# EAGLE board Orbiter_V3 (EAGLE 8.5.1)
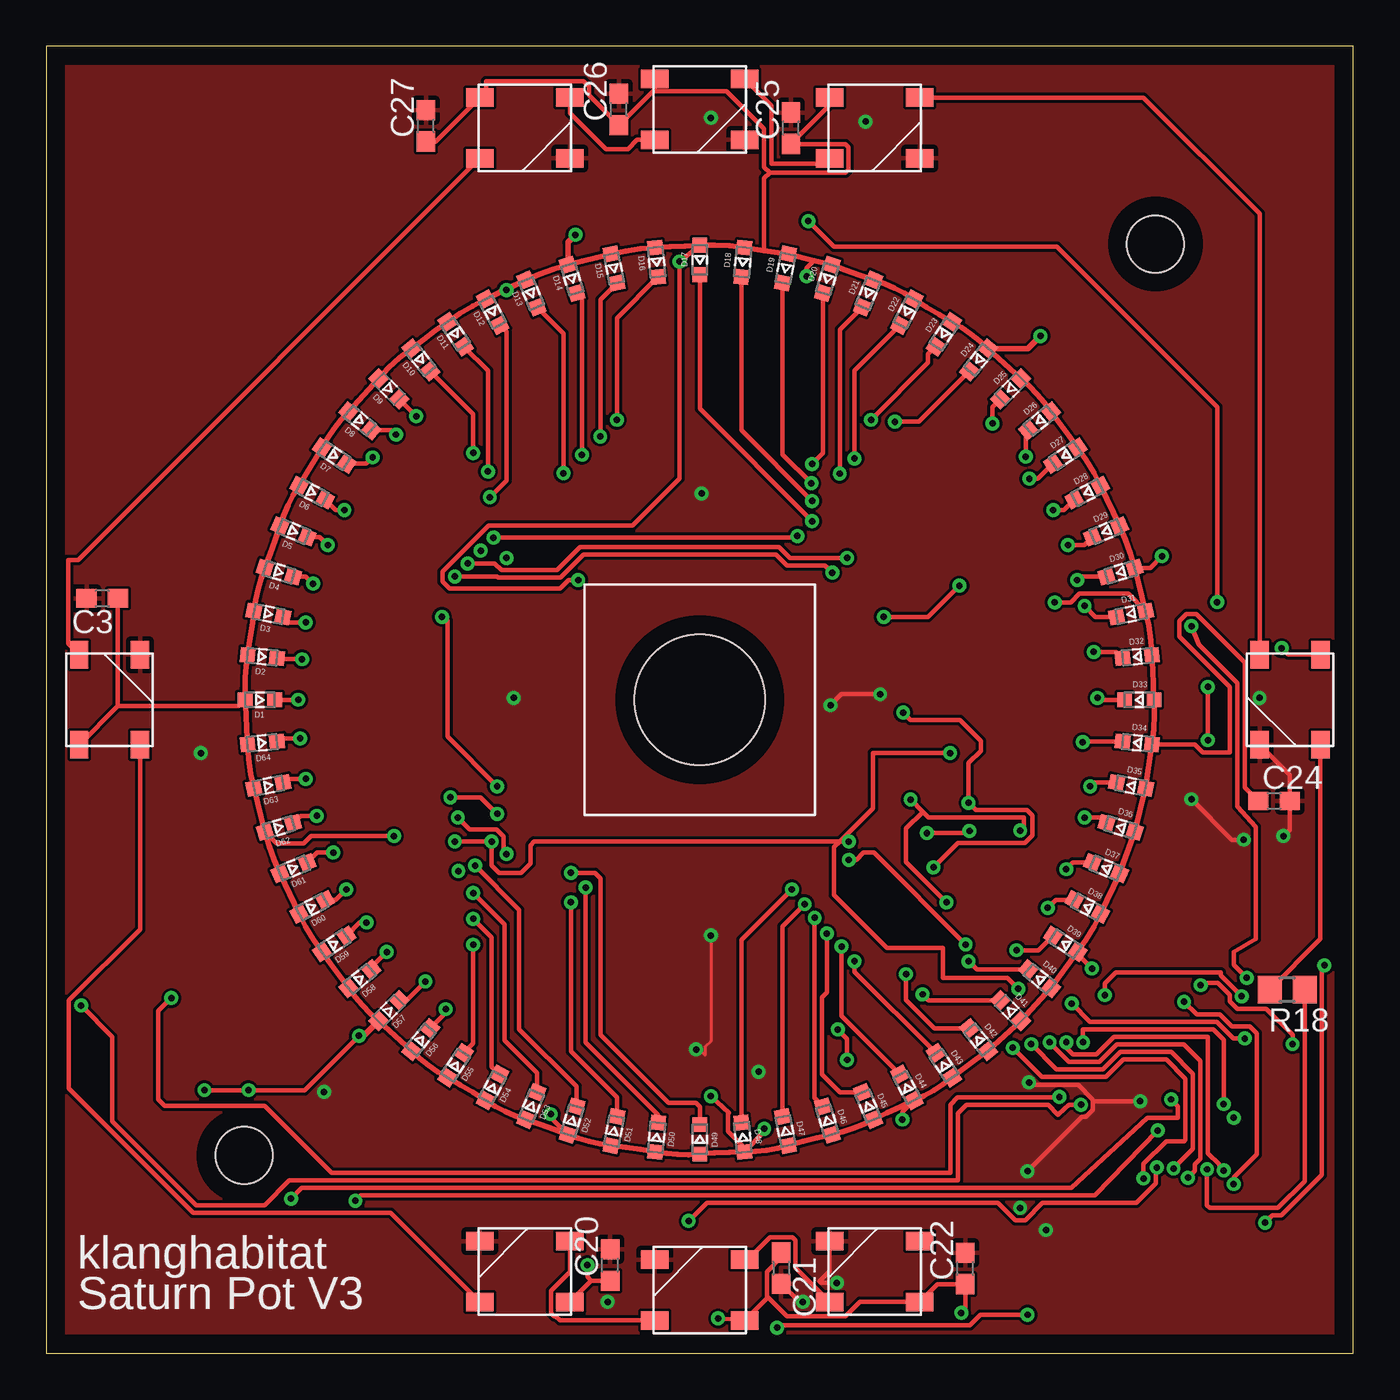
[diagram p0: board, top side]
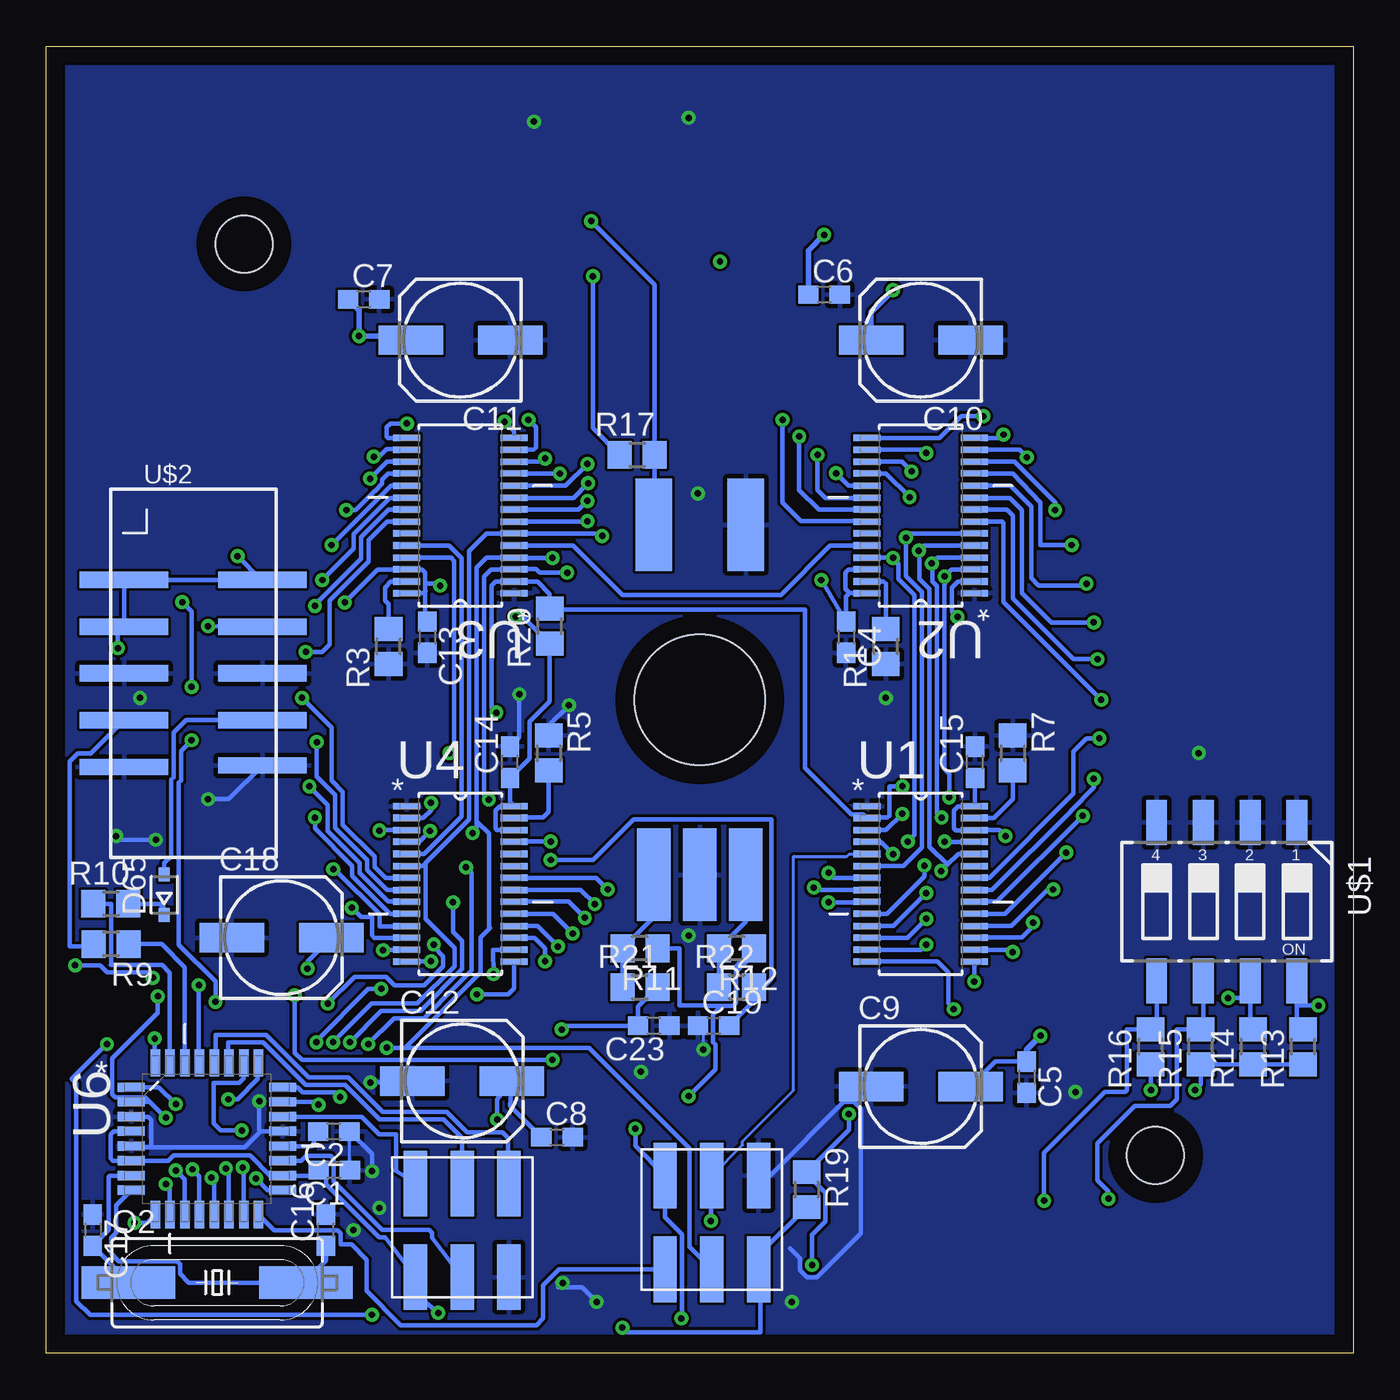
[diagram p1: board, bottom side, seen from below]

Size 71 x 71 mm. Coordinates in mm from the lower left corner, seen from the top.
Outline: 0,0 71,0 71,71 0,71 0,0
Copper layers (1*16): Top 0.035mm / dielectric 1.5mm / Bottom 0.035mm
Design rules "default": minimum track width 6mil, minimum drill 0.35mm, track to track 6mil, track to pad 6mil, pad to pad 6mil, via to via 6mil, smd to smd 6mil, copper to edge 40mil, drill to drill 6mil, minimum pad ring 10mil, minimum via ring 8mil, stop-mask expansion 4mil, vias tented up to drill 0mil, thermal gap 10mil
Holes 3.1 mm at 10.75,10.75 60.25,60.25

## Footprints (pad centres in the part's own frame; a part is rotated, then mirrored left to right if it is on the bottom)
C0603 = smd 1.1 x 1: 1 -0.85,0; 2 0.85,0
153CLV-0605 = smd 3.5 x 1.6: + 2.7,0; - -2.7,0
WL-SMCW_0603 = smd 0.8 x 0.8: 1 -0.8,0; 2 0.8,0
SOD323-R = smd 0.762 x 0.6: A 1.1,0; C -1.1,0
SM49 = smd 5.08 x 1.778: 1 -4.826,0; 2 4.826,0
R0805 = smd 1.3 x 1.5: 1 -0.95,0; 2 0.95,0
SOP65P640X120-29N = smd 1.473 x 0.356: 1 -2.921,4.216; 2 -2.921,3.581; 3 -2.921,2.921; 4 -2.921,2.286; 5 -2.921,1.626; 6 -2.921,0.965; 7 -2.921,0.33; 8 -2.921,-0.33; 9 -2.921,-0.965; 10 -2.921,-1.626; 11 -2.921,-2.286; 12 -2.921,-2.921; 13 -2.921,-3.581; 14 -2.921,-4.216; 15 2.921,-4.216; 16 2.921,-3.581; 17 2.921,-2.921; 18 2.921,-2.286; 19 2.921,-1.626; 20 2.921,-0.965; 21 2.921,-0.33; 22 2.921,0.33; 23 2.921,0.965; 24 2.921,1.626; 25 2.921,2.286; 26 2.921,2.921; 27 2.921,3.581; 28 2.921,4.216
QFP80P900X900X120-32N = smd 1.473 x 0.508: 1 -4.115,2.794; 2 -4.115,2.007; 3 -4.115,1.194; 4 -4.115,0.406; 5 -4.115,-0.406; 6 -4.115,-1.194; 7 -4.115,-2.007; 8 -4.115,-2.794; 17 4.115,-2.794; 18 4.115,-2.007; 19 4.115,-1.194; 20 4.115,-0.406; 21 4.115,0.406; 22 4.115,1.194; 23 4.115,2.007; 24 4.115,2.794 | smd 0.508 x 1.473: 9 -2.794,-4.115; 10 -2.007,-4.115; 11 -1.194,-4.115; 12 -0.406,-4.115; 13 0.406,-4.115; 14 1.194,-4.115; 15 2.007,-4.115; 16 2.794,-4.115; 25 2.794,4.115; 26 2.007,4.115; 27 1.194,4.115; 28 0.406,4.115; 29 -0.406,4.115; 30 -1.194,4.115; 31 -2.007,4.115; 32 -2.794,4.115
CTS-219-04 = smd 1.13 x 2.44: 1 -3.81,-4.3; 2 -1.27,-4.3; 3 1.27,-4.3; 4 3.81,-4.3; 5 3.81,4.3; 6 1.27,4.3; 7 -1.27,4.3; 8 -3.81,4.3
87832-10 = smd 0.89 x 4.8: 1 -5.08,-3.759; 2 -5.08,3.757; 3 -2.54,-3.759; 4 -2.54,3.757; 5 0,-3.759; 6 0,3.757; 7 2.54,-3.759; 8 2.54,3.757; 9 5.08,-3.759; 10 5,3.757
6PIN_HEADER_SMD_OPEN = smd 1.27 x 3.56: 1 -2.54,-2.7; 2 -2.54,2.38; 3 0,-2.7; 4 0,2.38; 5 2.54,-2.7; 6 2.54,2.38
BOURNS_ENCODER_SMD = smd 2 x 5 bottom: S1 -2.5,9.5; S2 2.5,9.5 | smd 1.8 x 5 bottom: TA 2.5,-9.5; TB -2.5,-9.5; VDC 0,-9.5 | hole 7.1: 0,0
WS2812 = smd 1.5 x 1: DIN 2.45,1.7; DOUT -2.45,-1.6; GND 2.45,-1.6; VDD -2.45,1.7

## Placement (x,y rotation side)
C1  1uF  [C0603]  55.35,9.96 180 bottom
C2  100nF  [C0603]  55.38,12.06 180 bottom
C3  100n  [C0603]  3.05,41 180 top
C4  100n  [C0603]  27.55,38.9 270 bottom
C5  100n  [C0603]  17.75,15 270 bottom
C6  100n  [C0603]  28.75,57.5 0 bottom
C7  100n  [C0603]  53.75,57.25 0 bottom
C8  100n  [C0603]  43.25,11.75 0 bottom
C9  10u  [153CLV-0605]  23.5,14.5 0 bottom
C10  10u  [153CLV-0605]  23.5,55.03 180 bottom
C11  10u  [153CLV-0605]  48.5,55.03 180 bottom
C12  10u  [153CLV-0605]  48.4,14.8 0 bottom
C13  100n  [C0603]  50.3,38.9 270 bottom
C14  100n  [C0603]  45.8,32.1 90 bottom
C15  100n  [C0603]  20.55,32.1 90 bottom
C16  22p  [C0603]  55.79,6.7 90 bottom
C17  22p  [C0603]  68.46,6.7 270 bottom
C18  4,7uF/16V  [153CLV-0605]  58.21,22.58 0 bottom
C19  10nF  [C0603]  34.75,17.8 0 bottom
C20  100n  [C0603]  30.63,4.8 90 top
C21  100n  [C0603]  39.92,4.63 270 top
C22  100n  [C0603]  49.92,4.62 90 top
C23  10nF  [C0603]  38,17.8 180 bottom
C24  100n  [C0603]  66.69,30 0 top
C25  100n  [C0603]  40.45,66.54 90 top
C26  100n  [C0603]  31.11,67.56 90 top
C27  100n  [C0603]  20.63,66.67 90 top
D1  SMD_LED_0603  [WL-SMCW_0603]  11.62,35.5 180 top
D2  SMD_LED_0603  [WL-SMCW_0603]  11.74,37.84 174.4 top
D3  SMD_LED_0603  [WL-SMCW_0603]  12.08,40.16 168.8 top
D4  SMD_LED_0603  [WL-SMCW_0603]  12.65,42.43 163.1 top
D5  SMD_LED_0603  [WL-SMCW_0603]  13.44,44.64 157.5 top
D6  SMD_LED_0603  [WL-SMCW_0603]  14.44,46.75 151.9 top
D7  SMD_LED_0603  [WL-SMCW_0603]  15.65,48.76 146.3 top
D8  SMD_LED_0603  [WL-SMCW_0603]  17.04,50.65 140.6 top
D9  SMD_LED_0603  [WL-SMCW_0603]  18.62,52.38 135 top
D10  SMD_LED_0603  [WL-SMCW_0603]  20.35,53.96 129.4 top
D11  SMD_LED_0603  [WL-SMCW_0603]  22.24,55.35 123.8 top
D12  SMD_LED_0603  [WL-SMCW_0603]  24.25,56.56 118.2 top
D13  SMD_LED_0603  [WL-SMCW_0603]  26.36,57.56 112.5 top
D14  SMD_LED_0603  [WL-SMCW_0603]  28.57,58.35 106.9 top
D15  SMD_LED_0603  [WL-SMCW_0603]  30.84,58.92 101.3 top
D16  SMD_LED_0603  [WL-SMCW_0603]  33.16,59.26 95.6 top
D17  SMD_LED_0603  [WL-SMCW_0603]  35.5,59.38 90 top
D18  SMD_LED_0603  [WL-SMCW_0603]  37.84,59.26 84.4 top
D19  SMD_LED_0603  [WL-SMCW_0603]  40.16,58.92 78.8 top
D20  SMD_LED_0603  [WL-SMCW_0603]  42.43,58.35 73.1 top
D21  SMD_LED_0603  [WL-SMCW_0603]  44.64,57.56 67.5 top
D22  SMD_LED_0603  [WL-SMCW_0603]  46.75,56.56 61.9 top
D23  SMD_LED_0603  [WL-SMCW_0603]  48.76,55.35 56.3 top
D24  SMD_LED_0603  [WL-SMCW_0603]  50.65,53.96 50.6 top
D25  SMD_LED_0603  [WL-SMCW_0603]  52.38,52.38 45 top
D26  SMD_LED_0603  [WL-SMCW_0603]  53.96,50.65 39.4 top
D27  SMD_LED_0603  [WL-SMCW_0603]  55.35,48.76 33.8 top
D28  SMD_LED_0603  [WL-SMCW_0603]  56.56,46.75 28.1 top
D29  SMD_LED_0603  [WL-SMCW_0603]  57.56,44.64 22.5 top
D30  SMD_LED_0603  [WL-SMCW_0603]  58.35,42.43 16.9 top
D31  SMD_LED_0603  [WL-SMCW_0603]  58.92,40.16 11.3 top
D32  SMD_LED_0603  [WL-SMCW_0603]  59.26,37.84 5.6 top
D33  SMD_LED_0603  [WL-SMCW_0603]  59.37,35.5 0 top
D34  SMD_LED_0603  [WL-SMCW_0603]  59.26,33.16 354.4 top
D35  SMD_LED_0603  [WL-SMCW_0603]  58.92,30.84 348.8 top
D36  SMD_LED_0603  [WL-SMCW_0603]  58.35,28.57 343.1 top
D37  SMD_LED_0603  [WL-SMCW_0603]  57.56,26.36 337.5 top
D38  SMD_LED_0603  [WL-SMCW_0603]  56.56,24.25 331.9 top
D39  SMD_LED_0603  [WL-SMCW_0603]  55.35,22.24 326.3 top
D40  SMD_LED_0603  [WL-SMCW_0603]  53.96,20.35 320.6 top
D41  SMD_LED_0603  [WL-SMCW_0603]  52.38,18.62 315 top
D42  SMD_LED_0603  [WL-SMCW_0603]  50.65,17.04 309.4 top
D43  SMD_LED_0603  [WL-SMCW_0603]  48.76,15.65 303.8 top
D44  SMD_LED_0603  [WL-SMCW_0603]  46.75,14.44 298.1 top
D45  SMD_LED_0603  [WL-SMCW_0603]  44.64,13.44 292.5 top
D46  SMD_LED_0603  [WL-SMCW_0603]  42.43,12.65 286.9 top
D47  SMD_LED_0603  [WL-SMCW_0603]  40.16,12.08 281.3 top
D48  SMD_LED_0603  [WL-SMCW_0603]  37.84,11.74 275.6 top
D49  SMD_LED_0603  [WL-SMCW_0603]  35.5,11.63 270 top
D50  SMD_LED_0603  [WL-SMCW_0603]  33.16,11.74 264.4 top
D51  SMD_LED_0603  [WL-SMCW_0603]  30.84,12.08 258.8 top
D52  SMD_LED_0603  [WL-SMCW_0603]  28.57,12.65 253.1 top
D53  SMD_LED_0603  [WL-SMCW_0603]  26.36,13.44 247.5 top
D54  SMD_LED_0603  [WL-SMCW_0603]  24.25,14.44 241.9 top
D55  SMD_LED_0603  [WL-SMCW_0603]  22.24,15.65 236.3 top
D56  SMD_LED_0603  [WL-SMCW_0603]  20.35,17.04 230.6 top
D57  SMD_LED_0603  [WL-SMCW_0603]  18.62,18.62 225 top
D58  SMD_LED_0603  [WL-SMCW_0603]  17.04,20.35 219.4 top
D59  SMD_LED_0603  [WL-SMCW_0603]  15.65,22.24 213.8 top
D60  SMD_LED_0603  [WL-SMCW_0603]  14.44,24.25 208.1 top
D61  SMD_LED_0603  [WL-SMCW_0603]  13.44,26.36 202.5 top
D62  SMD_LED_0603  [WL-SMCW_0603]  12.65,28.57 196.9 top
D63  SMD_LED_0603  [WL-SMCW_0603]  12.08,30.84 191.3 top
D64  SMD_LED_0603  [WL-SMCW_0603]  11.74,33.16 185.6 top
D65  4148  [SOD323-R]  64.58,24.91 90 bottom
Q2  16MHZ  [SM49]  61.71,3.85 0 bottom
R1  2k  [R0805]  25.4,38.4 90 bottom
R3  2k  [R0805]  52.4,38.4 90 bottom
R5  2k  [R0805]  43.7,32.6 270 bottom
R7  2k  [R0805]  18.5,32.6 270 bottom
R9  1k  [R0805]  67.46,22.23 180 bottom
R10  1k  [R0805]  67.48,24.43 0 bottom
R11  10k  [R0805]  38.75,22 180 bottom
R12  10k  [R0805]  33.5,22 180 bottom
R13  10k  [R0805]  2.74,16.66 90 bottom
R14  10k  [R0805]  5.46,16.66 90 bottom
R15  10k  [R0805]  8.3,16.66 90 bottom
R16  10k  [R0805]  11.02,16.66 90 bottom
R17  10k  [R0805]  38.9,48.8 0 bottom
R18  1k  [R0805]  67.4,19.75 180 top
R19  10k  [R0805]  29.7,8.9 270 bottom
R20  10k  [R0805]  43.65,39.5 90 bottom
R21  10k  [R0805]  38.75,19.9 0 bottom
R22  10k  [R0805]  33.5,19.9 0 bottom
U1  TLC5940  [SOP65P640X120-29N]  23.5,25.5 0 bottom
U2  TLC5940  [SOP65P640X120-29N]  23.5,45.5 180 bottom
U3  TLC5940  [SOP65P640X120-29N]  48.5,45.5 180 bottom
U4  TLC5940  [SOP65P640X120-29N]  48.5,25.5 0 bottom
U6  ATMEGA328  [QFP80P900X900X120-32N]  62.27,11.66 0 bottom
U$1  4PIN_DIP  [CTS-219-04]  6.88,24.53 180 bottom
U$2  10PIN_HEADER_SMD  [87832-10]  63,36.93 270 bottom
U$3  6PIN_HEADER_SMD_OPEN  [6PIN_HEADER_SMD_OPEN]  34.84,7.27 0 bottom
U$4  BOURNS_ENCODER  [BOURNS_ENCODER_SMD]  35.5,35.5 0 top
U$5  6PIN_HEADER_SMD_OPEN  [6PIN_HEADER_SMD_OPEN]  48.4,6.85 0 bottom
WS2  [WS2812]  67.5,35.5 270 top
WS3  [WS2812]  45,66.5 0 top
WS4  [WS2812]  35.5,67.5 0 top
WS5  [WS2812]  26,66.5 0 top
WS6  [WS2812]  3.5,35.5 90 top
WS8  [WS2812]  26,4.5 180 top
WS9  [WS2812]  35.5,3.5 180 top
WS10  [WS2812]  45,4.5 180 top

## Library data of the parts
C1-C27 D1-D65 Q2 R1 R3 R5 R7 R9-R22 U$1-U$5 WS2-WS6 WS8-WS10 = C_Sager_Bibliothek
U1-U4 = C_Sager_Bibliothek; MPN: TLC59401PWP; OC_FARNELL: -; OC_NEWARK: 64R0661; PACKAGE: TSSOP-28; SUPPLIER: Texas Instruments
U6 = C_Sager_Bibliothek; MPN: ATMEGA328P-AU; OC_FARNELL: 1715486; OC_NEWARK: 14R4631; PACKAGE: TQFP-32; SUPPLIER: Atmel

## Nets
A0: R13.2 U6.23 U$1.8
A1: R14.2 U6.24 U$1.7
A2: R15.2 U6.25 U$1.6
A3: R16.2 U6.26 U$1.5
A4: U6.27 U$5.4
A5: U6.28 U$5.6
A6: U6.19 U$5.3
A7: U6.22 U$5.2
D0/RX: R9.1 U6.30
D1/TX: R10.1 U6.31
D2/TB: C19.2 R22.2 U6.32
D3/GSCLK: U1.25 U2.25 U3.25 U4.25 U6.1
D4/TA: C23.2 R21.2 U6.2
D5: U6.9 U$2.4
D6/SWITCH: R17.2 U6.10 U$4.S2
D7/MODE: U1.6 U2.6 U3.6 U4.6 U6.11
D8/WS2812: R18.1 U6.12
D9/XLAT: U1.3 U2.3 U3.3 U4.3 U6.13
D10/BLANK: R20.2 U1.2 U2.2 U3.2 U4.2 U6.14
D11/MOSI/SIN: U1.5 U6.15 U$3.4
D12/MISO: U6.16 U$3.1
D13/SCK: U1.4 U2.4 U3.4 U4.4 U6.17 U$3.3
GND: C1.1 C2.1 C3.2 C4.2 C5.2 C6.2 C7.2 C8.2 C9.- C10.- C11.- C12.- C13.2 C14.2 C15.2 C16.2 C17.1 C18.- C19.1 C20.2 C21.2 C22.2 C23.1 C24.2 C25.2 C26.2 C27.2 R1.1 R3.1 R5.1 R7.1 U1.1 U2.1 U3.1 U4.1 U6.3 U6.5 U6.21 U$1.1 U$1.2 U$1.3 U$1.4 U$2.5 U$2.6 U$2.9 U$2.10 U$3.6 U$4.S1 U$4.VDC U$5.5 WS2.GND WS3.GND WS4.GND WS5.GND WS6.GND WS8.GND WS9.GND WS10.GND
IREF_U1: R1.2 U2.27
IREF_U2: R3.2 U3.27
IREF_U3: R5.2 U4.27
IREF_U4: R7.2 U1.27
N$1: D1.1 U2.7
N$2: U1.24 U2.5
N$3: D2.1 U2.8
N$4: D8.1 U2.14
N$5: D3.1 U2.9
N$6: D9.1 U2.15
N$7: D4.1 U2.10
N$8: D10.1 U2.16
N$9: D5.1 U2.11
N$10: D6.1 U2.12
N$11: D7.1 U2.13
N$12: D11.1 U2.17
N$13: D12.1 U2.18
N$14: D13.1 U2.19
N$15: D14.1 U2.20
N$16: D15.1 U2.21
N$17: D16.1 U2.22
N$19: D17.1 U3.7
N$20: D18.1 U3.8
N$21: D19.1 U3.9
N$22: D20.1 U3.10
N$23: D21.1 U3.11
N$24: D22.1 U3.12
N$25: D23.1 U3.13
N$26: D24.1 U3.14
N$27: D25.1 U3.15
N$28: D26.1 U3.16
N$29: D27.1 U3.17
N$31: D28.1 U3.18
N$32: D29.1 U3.19
N$33: D30.1 U3.20
N$34: D31.1 U3.21
N$35: D32.1 U3.22
N$39: D33.1 U4.7
N$40: D34.1 U4.8
N$41: D35.1 U4.9
N$42: D36.1 U4.10
N$43: D37.1 U4.11
N$44: D38.1 U4.12
N$45: D39.1 U4.13
N$46: D40.1 U4.14
N$47: D41.1 U4.15
N$48: D42.1 U4.16
N$49: D43.1 U4.17
N$50: D44.1 U4.18
N$51: D45.1 U4.19
N$52: D46.1 U4.20
N$53: D47.1 U4.21
N$54: D48.1 U4.22
N$58: D49.1 U1.7
N$59: D50.1 U1.8
N$60: D51.1 U1.9
N$61: D52.1 U1.10
N$62: D53.1 U1.11
N$63: D54.1 U1.12
N$64: D55.1 U1.13
N$65: D56.1 U1.14
N$66: D57.1 U1.15
N$67: D58.1 U1.16
N$68: D59.1 U1.17
N$69: D60.1 U1.18
N$70: D61.1 U1.19
N$71: D62.1 U1.20
N$72: D63.1 U1.21
N$73: D64.1 U1.22
N$76: R18.2 WS2.DIN
N$77: D65.C R10.2
N$79: WS2.DOUT WS3.DIN
N$80: WS3.DOUT WS4.DIN
N$81: C17.2 Q2.1 U6.7
N$82: C16.1 Q2.2 U6.8
N$83: WS4.DOUT WS5.DIN
N$84: WS5.DOUT WS6.DIN
N$85: WS6.DOUT WS8.DIN
N$87: WS8.DOUT WS9.DIN
N$88: WS9.DOUT WS10.DIN
N$90: C2.2 U6.20
RESET: R19.2 U6.29 U$3.5
RX: R9.2 U$2.7
SIN_U2: U2.24 U3.5
SIN_U3: U3.24 U4.5
TA: R11.2 R21.1 U$4.TA
TB: R12.2 R22.1 U$4.TB
TX: D65.A U$2.8
VCC: C1.2 C3.1 C4.1 C5.1 C6.1 C7.1 C8.1 C9.+ C10.+ C11.+ C12.+ C13.1 C14.1 C15.1 C18.+ C20.1 C21.1 C22.1 C24.1 C25.1 C26.1 C27.1 D1.2 D2.2 D3.2 D4.2 D5.2 D6.2 D7.2 D8.2 D9.2 D10.2 D11.2 D12.2 D13.2 D14.2 D15.2 D16.2 D17.2 D18.2 D19.2 D20.2 D21.2 D22.2 D23.2 D24.2 D25.2 D26.2 D27.2 D28.2 D29.2 D30.2 D31.2 D32.2 D33.2 D34.2 D35.2 D36.2 D37.2 D38.2 D39.2 D40.2 D41.2 D42.2 D43.2 D44.2 D45.2 D46.2 D47.2 D48.2 D49.2 D50.2 D51.2 D52.2 D53.2 D54.2 D55.2 D56.2 D57.2 D58.2 D59.2 D60.2 D61.2 D62.2 D63.2 D64.2 R11.1 R12.1 R13.1 R14.1 R15.1 R16.1 R17.1 R19.1 R20.1 U1.26 U1.28 U2.26 U2.28 U3.26 U3.28 U4.26 U4.28 U6.4 U6.6 U6.18 U$2.1 U$2.2 U$2.3 U$3.2 U$5.1 WS2.VDD WS3.VDD WS4.VDD WS5.VDD WS6.VDD WS8.VDD WS9.VDD WS10.VDD

## Tracks (layer width: path | path; a pad name or v marks a point on that pad's centre or on a via)
A0  (via drill 0.35)
  Top 0.254: v56.2,13.51 55.54,13.51 55.3,13.27 54.96,12.97 54.43,13.49 49.97,13.49 49.52,13.05 49.52,9.39 13.2,9.39 11.87,8.06 8.14,8.06 3.6,12.6 3.6,17.2 v1.9,18.9
  Bottom 0.254: U$1.8 3.07,18.9 | 3.07,18.9 3.07,17.94 R13.2 | U6.23 56.35,13.67 v56.2,13.51 | v1.9,18.9 3.07,18.9
A1  (via drill 0.35)
  Top 0.254: v6.8,19.3 6.1,18.6 6.1,13.8 6.46,13.44 11.87,13.44 15.51,9.8 49.1,9.8 49.1,12.7 49.1,13.5 49.5,13.9 55,13.9 v55.03,13.93
  Bottom 0.254: U$1.7 5.61,19.3 | 5.61,19.3 5.61,17.76 R14.2 | U6.24 57.34,14.45 57.07,14.18 55.28,14.18 v55.03,13.93 | v6.8,19.3 5.61,19.3
A2  (via drill 0.35)
  Top 0.254: v13.3,8.4 13.89,8.99 55.69,8.99 59.8,12.8 61.47,12.8 61.47,13.43 v61.1,13.8
  Bottom 0.254: U$1.6 8.15,17.76 R15.2 9.59,17.61 9.6,17.6 9.6,13.8 9.96,13.44 11.87,13.44 13.9,11.41 13.9,9.4 13.3,8.8 v13.3,8.4 | U6.25 59.5,15.75 59.5,14.9 60.6,13.8 v61.1,13.8
A3  (via drill 0.35)
  Top 0.254: v60.37,12.11 56.94,8.58 17.08,8.58 v16.8,8.3
  Bottom 0.254: U$1.5 10.69,17.94 R16.2 12.29,17.61 12.3,17.6 12.3,14.3 12.4,14.2 13.5,14.2 16.8,10.9 v16.8,8.3 | U6.26 60.26,14.94 60.5,14.7 61.9,14.7 61.9,12.5 61.51,12.11 v60.37,12.11
A4
  Bottom 0.254: U6.27 61.1,15.8 61.1,16.9 59.21,16.9 56.9,14.59 54.76,14.59 52.9,12.72 49.42,12.72 48.4,11.7 U$5.4
A5
  Bottom 0.254: U$5.6 45.9,9.77 45.9,11.7 46.2,12 48.12,12 49.26,13.13 52.73,13.13 54.59,14.99 56.73,14.99 59.04,17.31 61.27,17.31 61.27,17.3 61.8,17.3 61.8,15.84 U6.28
A6
  Bottom 0.254: U$5.3 50.03,6.28 50.03,6.55 50.19,6.71 52.74,6.71 55.37,9.34 55.37,10.57 55.54,10.74 56.87,10.74 57.14,10.47 U6.19
A7
  Bottom 0.254: 52.04,9.94 52.03,9.94 | 52.03,9.94 U$5.2 | U6.22 58.14,12.84 53.86,12.84 52.92,11.9 52,11.9 52,9.97 52.03,9.94
D0/RX
  Bottom 0.254: R9.1 64.73,22.23 63.46,20.96 U6.30
D1/TX
  Bottom 0.254: U6.31 64.27,20.67 64.7,21.1 67.5,21.1 67.46,21.14 67.46,21.4 67.46,24.4 68.41,24.4 R10.1
D2/TB  (via drill 0.35)
  Top 0.254: v55.7,19 56.69,18.01 63.57,18.01 64.47,17.1 v65.1,17.1 | v49.94,22.21 44.95,27.2 44.4,27.2 44,26.8 v43.6,26.8
  Bottom 0.254: R22.2 32.55,19.4 | 32.55,19.4 32.55,19.15 C19.2 | U6.32 65.1,15.81 v65.1,17.1 | v55.7,19 54.24,20.46 52.53,20.46 52.07,20 50.47,20 49.44,21.03 49.44,21.57 49.94,22.07 v49.94,22.21 | v43.6,26.8 41.3,26.8 39.1,29 31.6,29 31.6,20.35 32.55,19.4
D3/GSCLK  (via drill 0.35)
  Top 0.254: v22.2,27.8 v24.2,27.8 24.2,26.5 24.6,26.1 25.8,26.1 26.3,26.6 26.3,27.6 26.5,27.8 43.1,27.8 | 43.1,27.8 v43.6,27.8 43.8,27.6 | 43.1,27.8 44.9,29.6 44.9,32.6 v49.1,32.6 | v52.8,19.8 52.2,20.4 48.7,20.4 48.7,22.02 45.67,22.02 42.8,24.9 42.8,27.5 43.1,27.8 | v63.96,13.54 63.96,17.04 63.4,17.6 56.3,17.6 56.3,16.92 v56.32,16.9
  Bottom 0.254: 23.84,28.16 v24.2,27.8 23.83,28.17 23.83,41.18 24.71,42.05 24.71,42.91 v25,43.2 25.01,43.21 U2.25 | v22.2,27.8 22.19,27.79 U1.25 | v43.6,27.8 45.56,27.8 U4.25 | U3.25 49.01,43.21 48.83,43.03 48.83,32.6 v49.1,32.6 | U6.1 64.87,14.45 v63.96,13.54 | v52.8,19.8 53.5,19.8 56.32,16.98 v56.32,16.9
D4/TA  (via drill 0.35)
  Top 0.254: 64.79,19.36 v64.93,19.4 63.8,20.53 63.8,20.7 58.1,20.7 57.5,20.1 v57.5,19.46 | v43.5,15.94 43.5,17.09 v42.99,17.59
  Bottom 0.254: R21.2 38.85,18.85 C23.2 42.79,17.8 v42.99,17.59 | U6.2 65.37,13.67 v64.5,12.8 65.62,13.92 67.23,13.92 67.4,14.08 67.4,16.03 64.93,18.5 v64.93,19.4 | v57.5,19.46 57.5,16.34 57.1,15.94 v43.5,15.94
D5  (via drill 0.35)
  Top 0.254: v66.2,7.1 66.59,7.49 67.07,7.49 69.28,9.71 69.28,20.95 v69.42,21.08 | v62.2,39.5 62.6,38.5 64.7,36.4 64.7,29.69 65.7,28.59 65.7,22.5 64.5,21.8 64.5,21.1 v65.2,20.4
  Bottom 0.254: U6.9 65.51,7.1 v66.2,7.1 | v65.2,20.4 65.49,20.69 67.67,20.69 68.06,21.08 v69.42,21.08 | v62.2,39.5 60.33,39.47 U$2.4
D6/SWITCH  (via drill 0.35)
  Top 0.254: v64.5,9.2 64.5,9.55 65.76,10.81 65.76,17.37 65.37,17.76 64.39,17.76 63.74,18.41 62.49,18.41 v61.8,19.1 | v63.1,33.3 v63.1,36.2 | v63.6,40.8 63.6,51.4 54.9,60.1 42.8,60.1 v41.4,61.5
  Bottom 0.254: U6.10 64.27,8.97 v64.5,9.2 | U$4.S2 37.95,45.05 37.95,48.5 R17.2 37.95,58.05 v41.4,61.5 | v61.8,19.1 61.8,20.2 63.8,22.2 63.8,30.99 63.67,31.12 63.67,32.73 v63.1,33.3 | v63.1,36.2 63.1,40.3 v63.6,40.8
D7/MODE  (via drill 0.35)
  Top 0.254: v24.3,44.3 40.7,44.3 v40.8,44.4 | v63.96,9.94 63.71,10.19 63.71,10.27 63.1,10.88 63.1,17.19 57.99,17.19 57.04,16.24 55.76,16.24 55.41,16.59 v55.41,16.9
  Bottom 0.254: U1.6 24.43,26.46 23.43,27.47 23.43,41.35 24.3,42.22 v24.3,44.3 24.07,44.53 U2.6 | v40.8,44.4 40.94,44.53 U3.6 47.06,44.53 48.02,43.58 48.02,29.01 50.4,26.62 50.4,26.6 | 50.4,26.6 50.53,26.46 U4.6 | U6.11 63.46,9.45 v63.96,9.94 | v55.41,16.9 55.16,17.15 55.16,17.17 53.32,19.01 50.84,19.01 48.83,21.02 48.83,22.02 50.4,23.6 50.4,26.6
D8/WS2812  (via drill 0.35)
  Top 0.254: R18.1 68.35,9.35 66.9,7.9 63.2,7.9 63.05,8.05 v63.05,10
  Bottom 0.254: U6.12 62.67,9.62 v63.05,10
D9/XLAT  (via drill 0.35)
  Top 0.254: v21.95,30.2 23.6,30.2 v24.5,29.3 | v22.2,42.2 24.5,42.2 24.56,42.14 27.94,42.14 29.19,43.39 39.63,43.39 40.23,42.79 42.31,42.79 v42.7,42.4 | v46.95,30.07 47.62,29.41 | 47.62,29.41 47.93,29.1 53.1,29.1 53.1,28.6 v52.9,28.4 | 48.8,24.6 v48.9,24.5 46.7,26.7 46.7,28.5 47.62,29.41 | v54.5,16.9 54.75,16.65 54.75,16.63 55.54,15.84 57.21,15.84 58.16,16.79 61.8,16.79 62.69,15.89 62.69,10.57 62.39,10.27 62.39,9.92 v62.02,9.54
  Bottom 0.254: v21.95,30.2 21.95,31.48 22.21,31.73 22.21,41.77 22.2,41.77 v22.2,42.2 21.82,42.58 U2.3 | v24.5,29.3 25.38,28.42 U1.3 | v42.7,42.4 44.2,42.4 44.4,42.6 45.56,42.6 U3.3 46.82,42.58 47.21,42.19 47.21,30.33 v46.95,30.07 | v52.9,28.4 52.88,28.42 U4.3 | v54.5,16.9 52.79,18.61 50.67,18.61 48.4,20.88 48.4,22.4 48.9,22.9 v48.9,24.5 | U6.13 61.86,9.39 v62.02,9.54
D10/BLANK  (via drill 0.35)
  Top 0.254: v24.5,30.8 21.8,33.49 21.8,39.8 21.6,40 v21.5,40 | v46.55,34.8 46.94,34.41 49.62,34.41 50.76,33.27 50.76,32.73 50.1,32.07 v50.1,29.9 50.49,29.51 53.27,29.51 53.56,29.22 53.56,28.13 53.15,27.72 49.52,27.72 v48.2,26.4 | v53.5,16.8 54.87,15.43 57.38,15.43 58.33,16.38 61.1,16.38 62.29,15.19 62.29,11.1 v61.23,10.04
  Bottom 0.254: v24.5,30.8 25.2,30.8 25.2,29.2 25.3,29.1 26.4,29.1 U1.2 26.6,29.26 27.27,29.26 29.8,31.79 29.8,40.4 43.6,40.4 R20.2 43.65,41.25 44.32,41.92 U3.2 46.58,41.92 46.8,41.7 46.8,35.05 v46.55,34.8 | v21.5,40 21.8,40.3 21.8,41.6 21.48,41.92 U2.2 | v50.1,29.9 50.1,29.5 50.52,29.08 U4.2 | U6.14 61.07,9.88 v61.23,10.04 | v53.5,16.8 52.1,18.2 50.48,18.2 48.7,19.98 48.7,20 47.9,20.8 47.9,26.1 v48.2,26.4
D11/MOSI/SIN  (via drill 0.35)
  Top 0.254: v60.32,10.1 60.26,10.04 60.26,9.23 59.2,8.17 54.1,8.17 53.17,7.24 52.63,7.24 51.7,8.17 35.9,8.17 34.93,7.2 v34.9,7.2
  Bottom 0.152: U$3.4 33.17,11.33 33.17,11.53 30.4,14.29 30.4,27 27.5,27 27.37,27.13 U1.5
  Bottom 0.254: U6.15 60.26,10.04 v60.32,10.1 | v34.9,7.2 34.9,9.59 U$3.4
D12/MISO
  Bottom 0.254: U$3.1 43.13,4.57 44,3.7 44,1.9 44.36,1.54 51.74,1.54 53.6,3.4 53.6,5.1 54.41,5.91 55.02,5.91 55.02,6.52 55.18,6.68 58.61,6.68 U6.16
D13/SCK  (via drill 0.35)
  Top 0.254: v22.36,29.1 23,28.46 24.47,28.46 24.86,28.07 24.86,27.27 v25,27.12 | v22.9,42.9 24.37,42.9 24.73,42.54 27.74,42.54 29,43.8 39.8,43.8 40.4,43.2 v43.5,43.2 | v47.84,28.26 50.03,28.26 v50.15,28.38 | v59.6,9.5 59.6,10.31 60.83,11.53 61.81,11.53 61.88,11.6 61.88,14.92 60.83,15.97 58.5,15.97 57.55,15.02 54.08,15.02 v52.5,16.6
  Bottom 0.254: 20.56,43.24 U2.4 22.59,43.21 v22.9,42.9 22.86,42.86 22.86,41.93 22.61,41.68 22.61,29.35 v22.36,29.1 | v25,27.12 25.66,27.79 U1.4 | v43.5,43.2 45.56,43.2 U3.4 47.09,43.21 47.61,42.69 47.61,28.9 | v47.84,28.26 47.61,28.48 47.61,28.9 | v50.15,28.38 50.74,27.79 U4.4 | U6.17 58.97,8.87 v59.6,9.5 | v52.5,16.6 51.5,16.6 | 46.95,23.05 47.4,22.6 47.4,20.7 51.5,16.6 | 46.95,23.05 46.9,23.1 | 47.61,28.9 46.95,28.24 46.95,23.05 | U$3.3 36.06,5.79 36.06,11.14 41.52,16.6 51.5,16.6
GND  (via drill 0.35)
  Top 0.152: v36.1,22.7 36.1,16.96 35.79,16.65 35.79,16.2 35.48,16.51 v35.3,16.51 | 56.94,13.7 56.86,13.78
  Top 0.254: WS10.GND 42.55,4.45 42.01,3.91 42.09,3.83 v42.94,3.83 | C21.2 40.9,2.8 v41.1,2.8 | v42.6,35.2 43.2,35.8 v45.3,35.8 | v62.2,30.1 64.4,27.9 v65.04,27.9 | v67.2,28.1 67.54,28.44 C24.2 67.54,31.41 WS2.GND | v53.3,9.9 56.25,12.85 56.47,12.85 56.86,13.24 56.86,13.78 56.06,14.59 53.51,14.59 v53.38,14.72 | v59.42,13.7 56.94,13.7
  Bottom 0.152: v35.3,16.51 35.3,17.5 C19.1 | C2.1 54.53,9.99 C1.1 | 65.67,11.2 65.72,11.25 66.2,11.25 U6.5 66.05,11.18 | 65.98,12.85 U6.3 | 59.2,13.48 v59.42,13.7
  Bottom 0.254: 30.6,5.7 30.06,5.16 30.06,4.53 29.67,4.14 29.13,4.14 26.74,6.53 26.74,13.27 27.13,13.66 27.69,13.66 31.7,9.65 U$3.6 | v41.1,2.8 41.9,3.6 43.17,3.6 | 43.2,3.6 43.17,3.6 | 43.17,3.6 v42.94,3.83 | R5.1 43.7,34.1 v42.6,35.2 | v45.3,35.8 45.3,33.45 C14.2 | U$2.10 61.07,30.1 v62.2,30.1 | v65.04,27.9 67,27.9 v67.2,28.1 | C2.1 53.3,10.83 v53.3,9.9 | v53.38,14.72 51.28,14.72 C12.- | U6.21 59.33,12.07 | 59.33,12.07 60.2,11.2 65.3,11.2 | 65.3,11.2 66.15,11.2 66.2,11.25 | U6.3 65.45,12.85 65.3,12.7 65.3,11.2 | v59.42,13.7 59.42,12.15 59.33,12.07
  other vias: 54.3,6.7 52.9,7.9 65.9,35.6 44.5,66.9 36.1,67.1 15.1,14.2 25.4,35.6 30.5,2.8 8.4,32.6 35.6,46.7 38.7,15.3
  pour Bottom: -0.5,71.5 -0.5,-0.5 71.5,-0.5 71.5,71.5
  pour Top: -1.5,72 -1.5,-1.5 72.5,-1.5 72.5,72
IREF_U1
  Bottom 0.254: U2.27 25.52,41.92 25.4,41.8 R1.2
IREF_U2
  Bottom 0.254: R3.2 52.4,40.7 52.6,40.9 52.6,41.6 52.28,41.92 U3.27
IREF_U3
  Bottom 0.254: U4.27 45.56,29.1 44,29.1 43.7,29.4 R5.2
IREF_U4
  Bottom 0.254: R7.2 18.5,30.1 19.52,29.08 U1.27
N$1  (via drill 0.35)
  Top 0.254: D1.1 v13.7,35.5
  Bottom 0.254: v13.7,35.5 19,40.8 19,45.1 19.07,45.17 U2.7
N$2  (via drill 0.35)
  Top 0.254: v22.39,26.2 v22.4,26.21
  Bottom 0.254: U1.24 21.47,27.13 22.05,26.55 | 22.05,26.55 v22.39,26.2 | 22.05,26.55 23.02,27.52 23.02,41.51 23.56,42.05 23.56,43.56 v23.6,43.6 23.33,43.87 U2.5
N$3  (via drill 0.35)
  Top 0.254: v13.9,37.7 12.6,37.7 D2.1
  Bottom 0.254: U2.8 18.83,45.83 18.5,45.5 18.5,41 15.2,37.7 v13.9,37.7
N$4  (via drill 0.35)
  Top 0.254: v19,49.9 18.76,50.14 D8.1
  Bottom 0.254: U2.14 19.18,49.72 v19,49.9
N$5  (via drill 0.35)
  Top 0.254: v14.1,39.7 13.17,39.7 D3.1
  Bottom 0.254: U2.9 18.66,46.47 18,45.8 18,41.3 16.4,39.7 v14.1,39.7
N$6  (via drill 0.35)
  Top 0.254: v20.1,50.9 D9.1 | D9.1
  Bottom 0.254: U2.15 22.48,49.72 21.3,50.9 v20.1,50.9
N$7  (via drill 0.35)
  Top 0.254: v14.5,41.8 14.1,42.2 D4.1
  Bottom 0.254: U2.10 18.63,47.13 17.5,46 17.5,42.1 17.1,41.7 14.6,41.7 v14.5,41.8
N$8  (via drill 0.35)
  Top 0.254: v23.2,48.9 23.2,51 D10.1
  Bottom 0.254: U2.16 23.38,49.08 v23.2,48.9
N$9  (via drill 0.35)
  Top 0.254: v15.3,43.9 14.87,44.33 D5.1
  Bottom 0.254: U2.11 18.49,47.79 17,46.2 17,43.9 v15.3,43.9
N$10  (via drill 0.35)
  Top 0.254: v16.2,45.8 15.72,45.8 D6.1
  Bottom 0.254: U2.12 18.42,48.42 16.2,46.2 v16.2,45.8
N$11  (via drill 0.35)
  Top 0.254: v17.73,48.66 17.39,48.32 D7.1
  Bottom 0.254: U2.13 18.15,49.08 v17.73,48.66
N$12  (via drill 0.35)
  Top 0.254: v24,47.9 24,53.37 D11.1
  Bottom 0.254: U2.17 24.52,48.42 v24,47.9
N$13  (via drill 0.35)
  Top 0.254: v24.1,46.5 25,47.4 25,55.48 D12.1
  Bottom 0.254: U2.18 25.39,47.79 v24.1,46.5
N$14  (via drill 0.35)
  Top 0.254: v28.1,47.8 28.1,55.39 D13.1
  Bottom 0.254: U2.19 27.43,47.13 v28.1,47.8
N$15  (via drill 0.35)
  Top 0.254: v29.1,48.8 29.1,57.29 D14.1
  Bottom 0.254: U2.20 28.66,46.47 29.1,46.9 v29.1,48.8
N$16  (via drill 0.35)
  Top 0.254: v30.1,49.8 30.1,57.24 D15.1
  Bottom 0.254: U2.21 29.03,45.83 30.1,46.9 v30.1,49.8
N$17  (via drill 0.35)
  Top 0.254: v31,50.7 31,56.23 D16.1
  Bottom 0.254: U2.22 26.45,45.2 30,45.2 31,46.2 v31,50.7
N$19  (via drill 0.35)
  Top 0.254: D17.1 35.5,51.3 v41.6,45.2
  Bottom 0.254: v41.6,45.2 41.63,45.17 U3.7
N$20  (via drill 0.35)
  Top 0.254: v41.6,46.3 37.76,50.14 D18.1
  Bottom 0.254: U3.8 42.07,45.83 v41.6,46.3
N$21  (via drill 0.35)
  Top 0.254: D19.1 40.01,48.83 v41.56,47.27
  Bottom 0.254: v41.56,47.27 42.37,46.47 U3.9
N$22  (via drill 0.35)
  Top 0.254: v41.6,48.3 42.2,48.9 D20.1
  Bottom 0.254: U3.10 42.77,47.13 v41.6,48.3
N$23  (via drill 0.35)
  Top 0.254: D21.1 43.1,55.59 v43.1,47.78
  Bottom 0.254: v43.1,47.78 U3.11
N$24  (via drill 0.35)
  Top 0.254: v43.9,48.6 43.9,53.38 D22.1
  Bottom 0.254: U3.12 44.08,48.42 v43.9,48.6
N$25  (via drill 0.35)
  Top 0.254: v44.8,50.7 47.9,53.8 47.9,54.27 D23.1
  Bottom 0.254: U3.13 44.52,49.08 44.4,49.2 44.4,50.3 v44.8,50.7
N$26  (via drill 0.35)
  Top 0.254: D24.1 47.4,50.6 v46.1,50.6
  Bottom 0.254: v46.1,50.6 45.58,50.08 U3.14
N$27  (via drill 0.35)
  Top 0.254: v51.4,50.5 51.4,51.4 D25.1
  Bottom 0.254: U3.15 52.42,49.72 52.5,49.8 52.5,50.3 52.3,50.5 v51.4,50.5
N$28  (via drill 0.35)
  Top 0.254: D26.1 53.2,50 v53.2,48.7
  Bottom 0.254: v53.2,48.7 52.9,48.7 52.5,49.1 51.44,49.1 U3.16
N$29  (via drill 0.35)
  Top 0.254: v53.4,47.5 53.87,47.5 D27.1
  Bottom 0.254: U3.17 52.48,48.42 v53.4,47.5
N$31  (via drill 0.35)
  Top 0.254: v54.7,45.8 55.28,45.8 D28.1
  Bottom 0.254: U3.18 52.41,47.79 52.74,47.46 52.74,47.23 53.13,46.84 53.16,46.84 54.2,45.8 v54.7,45.8
N$32  (via drill 0.35)
  Top 0.254: v55.5,43.9 56.39,43.9 D29.1
  Bottom 0.254: v55.5,43.9 52.96,46.44 52.27,47.13 U3.19
N$33  (via drill 0.35)
  Top 0.254: v56,42 56.2,42.2 D30.1
  Bottom 0.254: U3.20 52.34,46.47 54.3,44.5 54.3,43.7 v56,42
N$34  (via drill 0.35)
  Top 0.254: v56.4,40.6 57,40 D31.1
  Bottom 0.254: U3.21 52.4,45.83 53.89,44.33 53.89,43.18 56.4,40.67 v56.4,40.6
N$35  (via drill 0.35)
  Top 0.254: v56.9,38.1 58.13,38.1 D32.1
  Bottom 0.254: U3.22 52.48,45.17 53.49,44.16 53.49,43.01 55.6,40.9 55.6,38.5 56,38.1 v56.9,38.1
N$39  (via drill 0.35)
  Top 0.254: v57.1,35.6 57.2,35.5 D33.1
  Bottom 0.254: U4.7 52.56,25.83 53.16,26.43 53.16,26.98 54.89,28.71 54.89,30.49 55.5,31.11 55.5,34 v57.1,35.6
N$40  (via drill 0.35)
  Top 0.254: v56.3,33.2 56.34,33.24 D34.1
  Bottom 0.254: U4.8 52.47,25.17 53.56,26.26 53.56,26.81 55.29,28.54 55.29,30.32 56.3,31.33 v56.3,33.2
N$41  (via drill 0.35)
  Top 0.254: v56.7,30.8 56.9,31 D35.1
  Bottom 0.254: U4.9 52.41,24.54 53.97,26.09 53.97,26.64 55.7,28.38 55.7,29.8 v56.7,30.8
N$42  (via drill 0.35)
  Top 0.254: v56.4,29.1 57.29,29.1 D36.1
  Bottom 0.254: U4.10 52.33,23.87 54.38,25.93 54.38,26.48 56.4,28.5 v56.4,29.1
N$43  (via drill 0.35)
  Top 0.254: v55.4,26.3 55.77,26.67 D37.1
  Bottom 0.254: U4.11 51.44,23.2 52.89,23.2 52.89,23.87 55.16,26.13 55.23,26.13 v55.4,26.3
N$44  (via drill 0.35)
  Top 0.254: v54.4,24.2 54.83,24.63 D38.1
  Bottom 0.254: U4.12 53.18,22.58 53.3,22.7 53.3,23.7 53.9,23.7 v54.4,24.2
N$45  (via drill 0.35)
  Top 0.254: v52.7,21.9 53.9,21.9 D39.1
  Bottom 0.254: U4.13 52.68,21.92 v52.7,21.9
N$46  (via drill 0.35)
  Top 0.254: v50.1,21.3 50.54,20.86 D40.1
  Bottom 0.254: U4.14 50.12,21.28 v50.1,21.3
N$47  (via drill 0.35)
  Top 0.254: D41.1 | D41.1 47.91,19.19 v47.6,19.5
  Bottom 0.254: U4.15 45.58,19.82 45.9,19.5 v47.6,19.5
N$48  (via drill 0.35)
  Top 0.254: v46.7,20.6 46.7,19.2 48.24,17.66 D42.1
  Bottom 0.254: U4.16 46.72,21.92 v46.7,20.6
N$49  (via drill 0.35)
  Top 0.254: v43.9,21.3 43.9,20.73 D43.1
  Bottom 0.254: U4.17 44.48,22.58 43.9,22 v43.9,21.3
N$50  (via drill 0.35)
  Top 0.254: v43.2,22.1 43.2,18.32 D44.1
  Bottom 0.254: U4.18 44.31,23.21 v43.2,22.1
N$51  (via drill 0.35)
  Top 0.254: v42.4,22.8 42.4,19.6 42.15,19.35 42.15,15.15 43.12,14.18 D45.1
  Bottom 0.254: U4.19 43.48,23.87 v42.4,22.8
N$52  (via drill 0.35)
  Top 0.254: v41.74,23.66 41.74,13.87 D46.1
  Bottom 0.254: U4.20 42.62,24.54 v41.74,23.66
N$53  (via drill 0.35)
  Top 0.254: v41.2,24.4 40,23.2 D47.1
  Bottom 0.254: U4.21 41.97,25.17 v41.2,24.4
N$54  (via drill 0.35)
  Top 0.254: v40.5,25.2 37.76,22.46 D48.1
  Bottom 0.254: U4.22 41.13,25.83 v40.5,25.2
N$58  (via drill 0.35)
  Top 0.254: v28.5,26.1 29.8,26.1 30.1,25.8 30.1,17.3 33.8,13.6 35.3,13.6 35.5,13.4 D49.1
  Bottom 0.254: U1.7 28.23,25.83 v28.5,26.1
N$59  (via drill 0.35)
  Top 0.254: v29.3,25.3 29.3,16.9 33.24,12.96 D50.1
  Bottom 0.254: U1.8 29.17,25.17 v29.3,25.3
N$60  (via drill 0.35)
  Top 0.254: D51.1 31,13.9 28.5,16.4 v28.5,24.5
  Bottom 0.254: v28.5,24.5 26.46,24.5 U1.9
N$61  (via drill 0.35)
  Top 0.254: v23.3,26.5 25.7,24.1 25.7,17.6 28.8,14.5 D52.1
  Bottom 0.254: U1.10 25.33,23.87 23.3,25.9 v23.3,26.5
N$62  (via drill 0.35)
  Top 0.254: v23.2,25 24.9,23.3 24.9,17 26.67,15.23 D53.1
  Bottom 0.254: U1.11 24.99,23.21 v23.2,25
N$63  (via drill 0.35)
  Top 0.254: v23.2,23.6 24.2,22.6 24.2,15.57 D54.1
  Bottom 0.254: U1.12 24.22,22.58 v23.2,23.6
N$64  (via drill 0.35)
  Top 0.254: v23.2,22.2 23.2,16.83 D55.1
  Bottom 0.254: U1.13 23.48,21.92 v23.2,22.2
N$65  (via drill 0.35)
  Top 0.254: v21.7,18.7 21.7,18.5 D56.1
  Bottom 0.254: U1.14 22.58,21.28 22,20.7 22,19 v21.7,18.7
N$66  (via drill 0.35)
  Top 0.254: v20.6,20.2 19.59,19.19 D57.1
  Bottom 0.254: U1.15 20.58,20.22 v20.6,20.2
N$67  (via drill 0.35)
  Top 0.254: v18.5,21.8 17.66,20.96 D58.1
  Bottom 0.254: U1.16 18.62,21.92 v18.5,21.8
N$68  (via drill 0.35)
  Top 0.254: v17.4,23.4 17.03,23.4 D59.1
  Bottom 0.254: U1.17 20.56,22.6 18,22.6 17.4,23.2 v17.4,23.4
N$69  (via drill 0.35)
  Top 0.254: v16.3,25.2 15.73,24.63 D60.1
  Bottom 0.254: U1.18 18.59,23.21 16.5,25.3 16.4,25.3 v16.3,25.2
N$70  (via drill 0.35)
  Top 0.254: v15.6,27.2 14.71,27.2 D61.1
  Bottom 0.254: U1.19 18.93,23.87 v15.6,27.2
N$71  (via drill 0.35)
  Top 0.254: v14.7,29.2 13.81,29.2 D62.1
  Bottom 0.254: U1.20 19.36,24.54 v14.7,29.2
N$72  (via drill 0.35)
  Top 0.254: v14.1,31.2 13.07,31.2 D63.1
  Bottom 0.254: U1.21 19.63,25.17 15.36,29.44 15.36,29.47 14.1,30.73 v14.1,31.2
N$73  (via drill 0.35)
  Top 0.254: v13.8,33.4 12.7,33.4 D64.1
  Bottom 0.254: U1.22 19.77,25.83 15.2,30.4 15.2,32.7 14.5,33.4 v13.8,33.4
N$76
  Top 0.254: R18.2 69.2,22.5 WS2.DIN
N$77
  Bottom 0.254: R10.2 64.83,24.43 64.58,24.18 D65.C
N$79
  Top 0.254: WS2.DOUT 65.9,61.9 59.6,68.2 WS3.DIN
N$80
  Top 0.254: WS4.DIN 39.4,67.75 39.4,64.6 42.25,64.6 WS3.DOUT
N$81
  Bottom 0.254: Q2.1 66.53,3.92 C17.2 67.6,6.71 67.6,9.6 67.55,9.65 U6.7
N$82
  Bottom 0.254: Q2.2 57,3.85 | 57,3.85 63.25,3.85 63.72,4.32 63.72,4.85 63.88,5.02 67.06,5.02 67.47,5.43 67.47,6.27 67.19,6.54 67.19,8.05 U6.8 | C16.1 55.79,5.05 57,3.85
N$83
  Top 0.254: WS4.DOUT 32.1,65.9 31.6,65.4 30.4,65.4 28.45,67.35 WS5.DIN
N$84
  Top 0.254: WS5.DOUT 1.75,43.1 1.2,43.1 1.2,38.55 WS6.DIN
N$85
  Top 0.254: WS8.DIN 18.71,7.64 7.98,7.64 1.24,14.38 1.24,19.17 5.1,23.03 WS6.DOUT
N$87
  Top 0.254: WS8.DOUT 28.45,4.45 27.42,3.42 27.42,2.18 27.58,2.02 27.68,2.02 27.9,1.8 WS9.DIN
N$88
  Top 0.254: WS10.DIN 40.7,4.65 40.7,6.15 40.54,6.31 39.3,6.31 38.09,5.1 WS9.DOUT
N$90
  Bottom 0.254: U6.20 56.54,11.25 C2.2
RESET  (via drill 0.35)
  Top 0.254: v67.69,16.8 67.69,17.31 66.28,18.72 64.68,18.72 64.27,19.13 64.27,19.48 63.63,20.13 62.83,20.13 v62.7,20 | v53.3,2.1 50.73,2.1 50.17,1.54 39.84,1.54 v39.7,1.4
  Bottom 0.254: R19.2 32.3,5.35 U$3.5 32.2,4.47 32.2,1.14 39.44,1.14 v39.7,1.4 | v67.69,16.8 69.59,14.9 69.35,14.66 69.35,2.84 68.61,2.1 v53.3,2.1 | U6.29 62.7,15.8 v62.7,20
RX
  Bottom 0.254: U$2.7 68.58,32.57 69.28,32.57 69.7,32.15 69.7,22.1 68.55,22.1 R9.2
SIN_U2
  Bottom 0.254: U2.24 28.43,43.87 31.1,41.2 39.7,41.2 42.37,43.87 U3.5
SIN_U3
  Bottom 0.254: 50.23,43.87 U3.24 49.1,43.87 48.43,43.2 48.43,29.17 50.47,27.13 U4.5
TA
  Bottom 0.254: U$4.TA 38.1,25.9 38.1,23.6 R11.2 R21.1
TB
  Bottom 0.254: U$4.TB 33,23.45 R12.2 R22.1
TX
  Bottom 0.254: U$2.8 63.39,34.39 63.4,34.4 64.08,33.72 64.08,31.29 64.21,31.16 64.21,27 64.58,26.63 D65.A
VCC  (via drill 0.35)
  Top 0.254: v18.9,28.1 14.4,28.1 14,27.7 12.52,27.7 D62.2 | v54.78,40.78 55.65,40.78 56.13,41.26 58.76,41.26 D31.2 | v60.6,43.3 59.96,42.66 D30.2 | v56.8,20.9 56.02,21.68 D39.2 | v46.5,12.7 46.5,13.11 D44.2 | v41.3,58.5 41.3,58.94 41.71,59.35 | WS3.VDD 42.55,67.78 C25.1 40.47,65.68 43.42,65.68 43.58,65.52 43.58,64.28 43.42,64.12 39.3,64.12 | 32.95,68.55 C26.1 29.48,68.33 29.48,68.82 29.2,69.1 23.9,69.1 23.9,68.55 WS5.VDD 21.17,65.82 C27.1 | 32.95,68.55 33.05,68.65 WS4.VDD | 32.95,68.55 36.95,68.55 38.99,66.51 38.99,64.43 39.3,64.12 | 39.3,64.12 39,63.82 39,59.9 | C3.1 3.9,35.15 | 3.9,35.15 WS6.VDD | 3.9,35.15 10.47,35.15 D1.2 | WS8.VDD 29.6,3.95 | 29.6,3.95 C20.1 | C21.1 39.92,5.23 39.14,4.45 39.14,3.12 | 39.14,3.12 39.14,2.99 WS9.VDD v36.5,1.9 | v49.7,2.2 49.92,2.22 C22.1 48.42,3.77 WS10.VDD 44.2,2.8 43.42,2.02 40.24,2.02 39.14,3.12 | v27.4,13 27.4,12.82 D52.2 | v39,12.2 39,12.03 D48.2 37.92,11.18 37.03,12.06 37.03,13.02 37.1,13.08 v36.1,13.97 | v67.1,38.3 67.45,37.95 WS2.VDD | v8.6,14.3 v11,14.3 14.05,14.3 v17,17.25 | v49.6,41.7 47.9,40 v45.5,40 | v29.4,4.8 29.4,4.15 29.6,3.95 | C24.1 65.11,30.73 65.11,37.52 62.47,40.16 61.93,40.16 61.54,39.77 61.54,38.94 64.29,36.18 64.29,32.64 62.83,32.64 62.39,33.08 D34.2 | v28.9,42 28.38,42 27.92,41.54 21.93,41.54 21.54,41.93 21.54,42.47 24.03,44.96 31.86,44.96 34.4,47.5 v34.4,59.3 D17.2
  Top 0.305: D14.2 arc-2 D15.2 arc-10 D16.2 arc-1 D17.2 arc-11 D18.2 39,59.9 D19.2 41.71,59.35 D20.2 arc4 D21.2 arc-15 D22.2 arc4 D23.2 arc-15 D24.2 | D14.2 arc10 D13.2 | D13.2 arc2 D12.2 arc10 D11.2 arc1 D10.2 arc11 D9.2 arc-1 D8.2 arc13 D7.2 arc-2 D6.2 arc14 D5.2 arc-2 D4.2 arc13 D3.2 arc-2 D2.2 arc13 D1.2 arc-1 D64.2 arc12 D63.2 arc0 D62.2 arc11 D61.2 D60.2 arc11 D59.2 arc-1 D58.2 arc13 D57.2 | v28.75,60.75 28.34,60.34 D14.2 | D13.2 v25,57.75 | D57.2 arc-2 D56.2 arc15 D55.2 arc-4 D54.2 arc15 D53.2 arc-4 D52.2 arc15 D51.2 arc-4 D50.2 arc15 D49.2 arc-4 D48.2 arc15 D47.2 arc-4 D46.2 arc15 D45.2 arc-4 D44.2 arc15 D43.2 arc-5 D42.2 D41.2 D40.2 D39.2 arc11 D38.2 arc1 D37.2 D36.2 D35.2 D34.2 arc11 D33.2 arc-1 D32.2 arc12 D31.2 arc0 D30.2 arc11 D29.2 arc0 D28.2 arc11 D27.2 arc-1 D26.2 arc13 D25.2 arc-3 D24.2 | D24.2 53.33,54.58 v54,55.25 | v17,17.25 17.25,17.25 D57.2
  Bottom 0.254: U2.28 27.38,41.28 | 27.38,41.28 27.6,41.5 27.6,42.4 27.42,42.58 U2.26 | 27.38,41.28 27.55,41.12 C4.1 v28.9,42 | C15.1 20.55,29.75 U1.28 21.48,29.72 21.7,29.5 21.7,28.5 21.6,28.4 20.6,28.4 U1.26 19.22,28.42 v18.9,28.1 | 50.41,41.41 50.4,41.4 50.52,41.28 U3.28 | 50.41,41.8 50.41,42.41 50.58,42.58 U3.26 52.99,42.58 v54.78,40.78 | 50.41,41.8 50.41,41.41 | 50.41,41.41 50.41,39.85 C13.1 | v60.6,43.3 59.31,42.01 U$2.2 U$2.1 U$2.3 67.1,39.13 v67.1,38.3 | U4.26 46.52,28.42 46.6,28.5 46.6,29.5 46.38,29.72 U4.28 45.8,29.94 C14.1 44.73,32.32 44.73,34.32 43.65,35.4 R20.1 45.1,40 v45.5,40 | C18.+ 56.8,21.29 v56.8,20.9 | C9.+ 19.45,15.85 C5.1 | C8.1 45.8,13.45 C12.+ 46.5,13.8 v46.5,12.7 | U6.4 67.33,12.07 67.5,11.9 67.5,10.6 67.37,10.47 U6.6 64.36,10.47 64.07,10.76 59.93,10.76 58.82,9.65 U6.18 56.01,9.65 C1.2 55.78,9.54 55.78,9.17 52.91,6.3 52.59,6.3 U$5.1 50.94,3.24 v49.7,2.2 | R17.1 41.3,50.25 v41.3,58.5 | v27.4,13 27.4,12.15 R19.1 29.7,9.74 28.67,8.72 28.67,7.18 29.4,6.46 v29.4,4.8 | v39,12.2 39,11.27 U$3.2 37.38,7.38 36.47,6.47 36.47,1.87 v36.5,1.9 | R13.1 R14.1 R15.1 8.3,14.6 v8.6,14.3 | v11,14.3 11,15.69 R16.1 | 50.41,41.8 49.7,41.8 v49.6,41.7 | 34.32,18.87 35.22,18.87 35.24,18.9 36.6,18.9 36.6,22 R11.1 | 33.52,20.73 33.52,21.03 R12.1 32.55,21.7 33.52,20.73 | 34.32,18.87 33.68,18.87 33.52,19.03 33.52,20.73 | 34.32,18.87 34.77,18.42 34.77,16.91 34.65,16.78 34.65,15.43 v36.1,13.97
  Bottom 0.305: C6.1 29.6,59.9 v28.75,60.75 | C10.+ 26.2,56.55 v25,57.75 | C11.+ 51.42,55.25 v54,55.25 54,56.65 C7.1 | C5.1 17.75,16.5 v17,17.25

## Text on the board
tNames: klanghabitat | Saturn Pot V3